# EAGLE board Core LCD Shield (EAGLE 6.4)
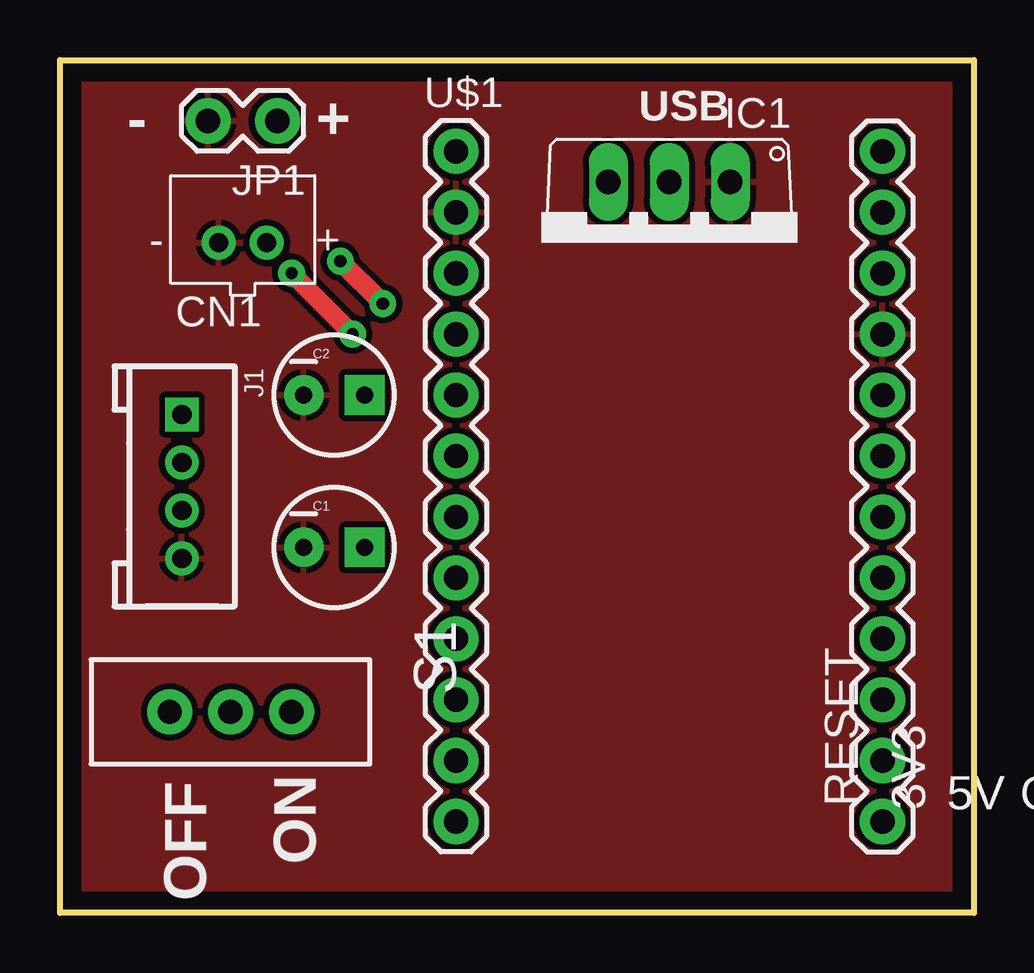
[diagram p0: board, top side]
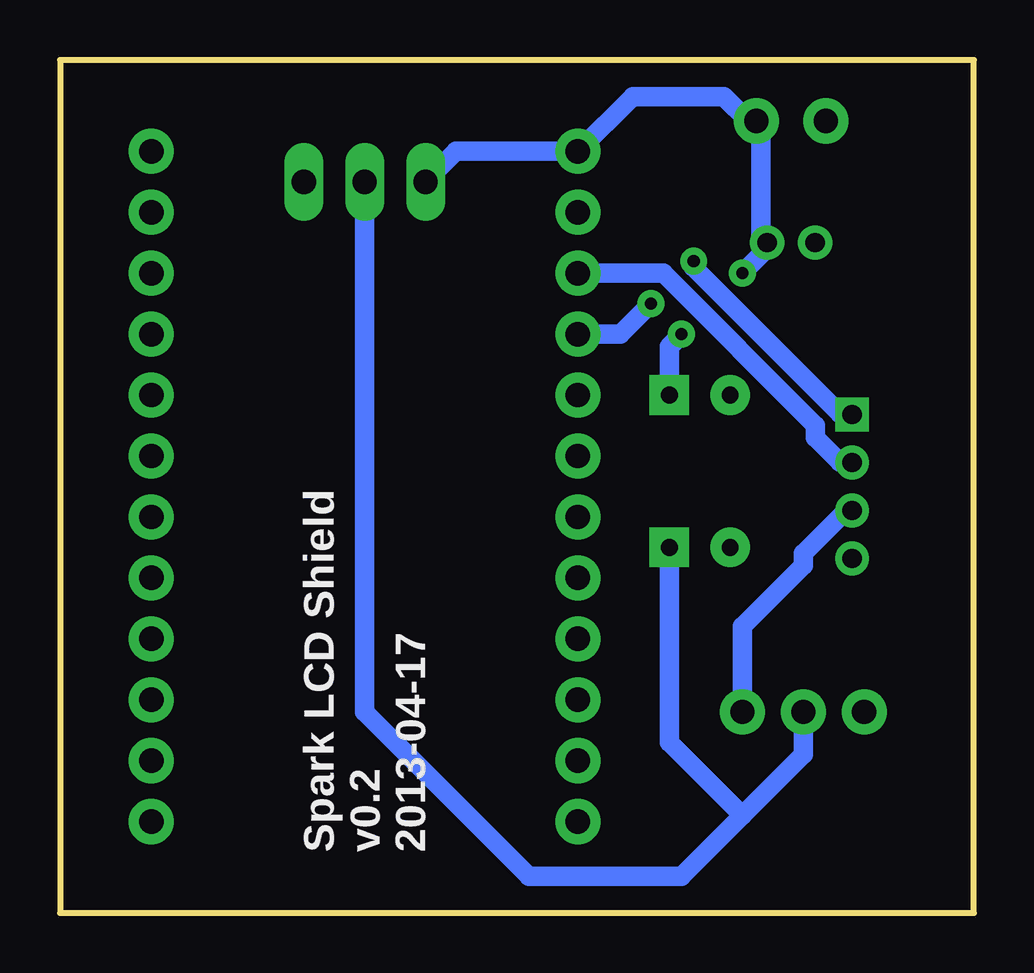
[diagram p1: board, bottom side, seen from below]

Size 38.1 x 35.56 mm. Coordinates in mm from the lower left corner, seen from the top.
Outline: 0,0 0,35.56 38.1,35.56 38.1,0 0,0
Copper layers (1*16): Top 0.035mm / dielectric 1.5mm / Bottom 0.035mm
Design rules "default *": minimum track width 10mil, minimum drill 12mil, track to track 10mil, track to pad 10mil, pad to pad 10mil, via to via 10mil, smd to smd 10mil, copper to edge 30mil, drill to drill 12mil, minimum pad ring 12mil, minimum via ring 12mil, stop-mask expansion 1mil, vias tented up to drill 0mil, thermal gap 10mil
Net classes: 0 default: width 0.152 mm, drill 0.305 mm, clearance 0.152 mm
vRestrict: area 47.9,10.3 to 48.5,10.8; area 50.4,10.2 to 50.9,11

## Footprints (pad centres in the part's own frame; a part is rotated, then mirrored left to right if it is on the bottom)
CPOL-RADIAL-10UF-25V = drill 0.7 pad 1.651 square: 1 1.27,0 | drill 0.7 pad 1.651: 2 -1.27,0
JST-PH-2-THM = drill 0.8 pad 1.422: 1 1,0; 2 -1,0
TO220V = drill 1.016 long: 1 -2.54,-2.54; 2 0,-2.54; 3 2.54,-2.54
2.0_1X4 = drill 0.8 pad 1.27 square: 1 -3,0 | drill 0.8 pad 1.27: 2 -1,0; 3 1,0; 4 3,0
1X02_LOCK = drill 1.016 pad 1.88: 1 -0.178,0; 2 2.718,0
SWITCH-SPDT = drill 1.016 pad 1.88: 1 0,2.54; 2 0,0; 3 0,-2.54
SPARK_CORE = drill 1.016 pad 1.88: 1 -8.89,13.97; 2 -8.89,11.43; 3 -8.89,8.89; 4 -8.89,6.35; 5 -8.89,3.81; 6 -8.89,1.27; 7 -8.89,-1.27; 8 -8.89,-3.81; 9 -8.89,-6.35; 10 -8.89,-8.89; 11 -8.89,-11.43; 12 -8.89,-13.97; 13 8.89,-13.97; 14 8.89,-11.43; 15 8.89,-8.89; 16 8.89,-6.35; 17 8.89,-3.81; 18 8.89,-1.27; 19 8.89,1.27; 20 8.89,3.81; 21 8.89,6.35; 22 8.89,8.89; 23 8.89,11.43; 24 8.89,13.97

## Placement (x,y rotation side)
C1  10uF  [CPOL-RADIAL-10UF-25V]  11.43,15.24 0 top
C2  1uF  [CPOL-RADIAL-10UF-25V]  11.43,21.59 0 top
CN1  [JST-PH-2-THM]  7.62,27.94 0 top
IC1  MC33269T-5.0  [TO220V]  25.4,27.94 180 top
J1  TWIG_2.0-DIP-FEMALE  [2.0_1X4]  5.08,17.78 270 top
JP1  [1X02_LOCK]  8.89,33.02 180 top
S1  [SWITCH-SPDT]  7.11,8.38 270 top
U$1  SPARK_CORECORE  [SPARK_CORE]  25.4,17.78 0 top
U$2  [SPARK_LOGO]  22.86,2.54 0 top

## Library data of the parts
C1 C2 = SparkFun-Capacitors
CN1 = adafruit
IC1 = linear
J1 = Connector
JP1 = SparkFun-Connectors
S1 = SparkFun-Electromechanical
U$1 U$2 = Spark

## Nets
+5V: J1.3 S1.1
GND: C1.2 C2.2 CN1.2 IC1.1 J1.4 JP1.2 U$1.2 U$1.21
N1: C1.1 IC1.2 S1.2
RX: J1.1 U$1.4
TX: J1.2 U$1.3
VCC: U$1.24
VDDA: U$1.22
VIN: C2.1 CN1.1 IC1.3 JP1.1 U$1.1

## Tracks (layer width: path | path; a pad name or v marks a point on that pad's centre or on a via)
+5V
  Bottom 0.813: S1.1 9.65,11.94 7.11,14.48 7.11,14.99 5.08,17.02 J1.3
GND
  pour Top: 0,0 0,35.56 38.1,35.56 38.1,0
N1
  Bottom 0.813: IC1.2 25.4,8.38 18.54,1.52 12.19,1.52 9.65,4.06 | 9.65,4.06 7.11,6.6 S1.2 | 9.65,4.06 12.7,7.11 C1.1
RX  (via drill 0.51)
  Top 0.813: v13.46,25.4 v11.68,27.18
  Bottom 0.813: v11.68,27.18 11.68,26.92 5.59,20.83 5.08,20.83 J1.1 | v13.46,25.4 14.73,24.13 U$1.4
TX
  Bottom 0.813: U$1.3 12.95,26.67 6.6,20.32 6.6,19.81 5.59,18.8 5.08,18.8 J1.2
VIN  (via drill 0.51)
  Top 0.813: v9.65,26.67 v12.19,24.13
  Bottom 0.813: IC1.3 21.59,31.75 U$1.1 14.22,34.04 10.41,34.04 9.4,33.02 JP1.1 8.89,33.02 8.89,28.19 8.64,27.94 CN1.1 8.64,27.69 v9.65,26.67 | C2.1 12.7,23.62 v12.19,24.13

## Text on the board
tPlace: USB | - | + | ON | OFF
bPlace: Spark LCD Shield / v0.2 / 2013-04-17
tNames: AREF | GND | # | # | # | # | # | # | DIGITAL | [#=PWM] | TX | RX | ANALOG IN | RESET | 3V3 | 5V | GND | VIN | A0 | A1 | A2 | A3 | A4 | A5
214bmp: D:/SmartProjects/Snc/a4_bn_logo2.bmp